# Altium PCB DeerDongle.PcbDoc
Units mil, origin at the board's own origin, x right, y up, seen from the top; angles counter-clockwise.
Board outline 2155.76 x 2254.08 mil, 4 copper layers (Top Layer, Mid Layer 1, Mid Layer 2, Bottom Layer), stack 46.063 mil thick; 30 components, 34 nets, 146 pads, 37 vias.
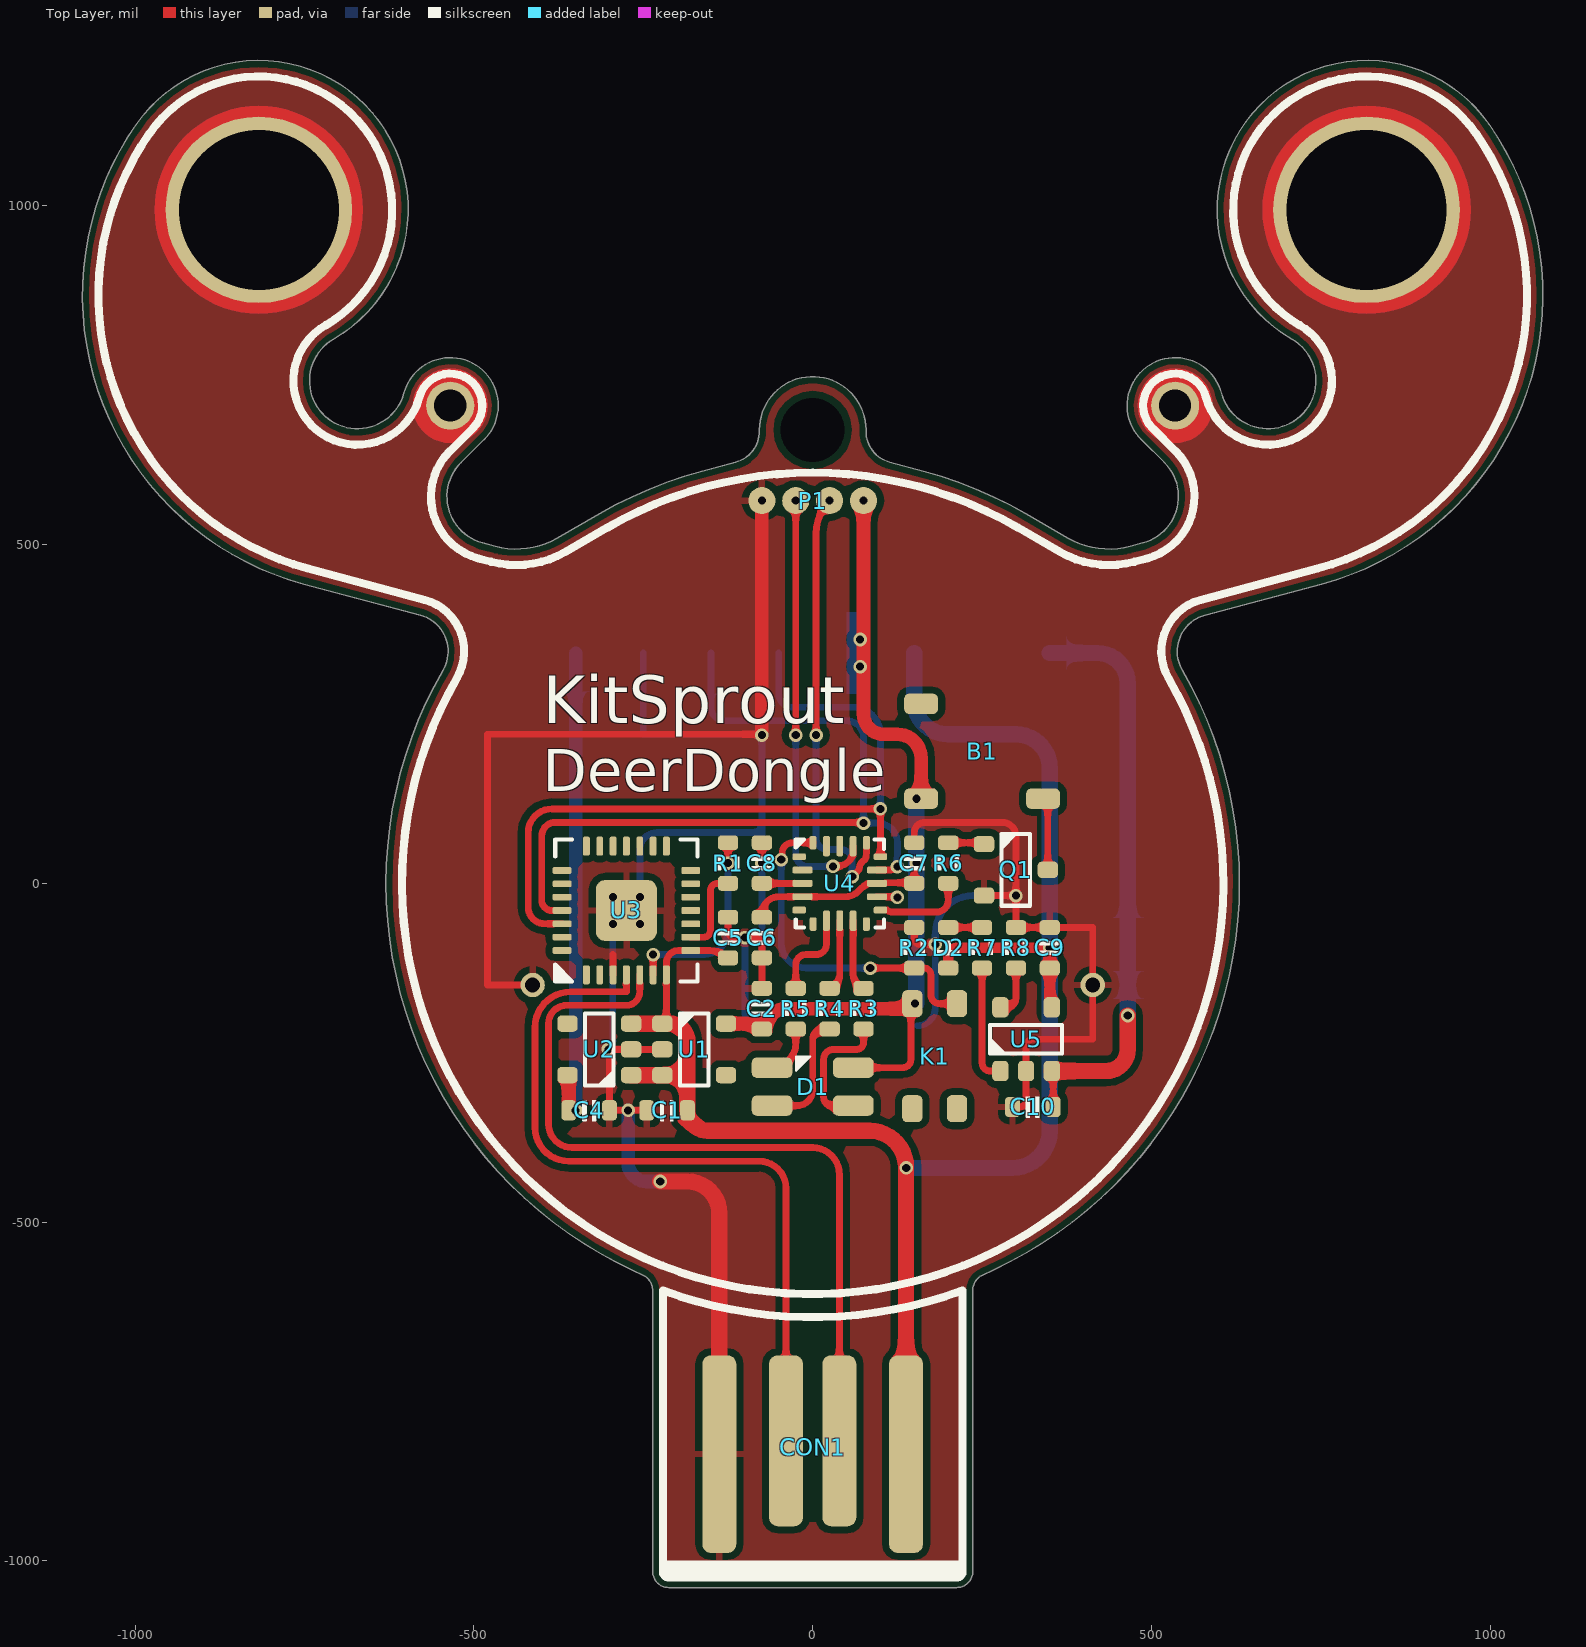
[diagram p0: Top Layer view]
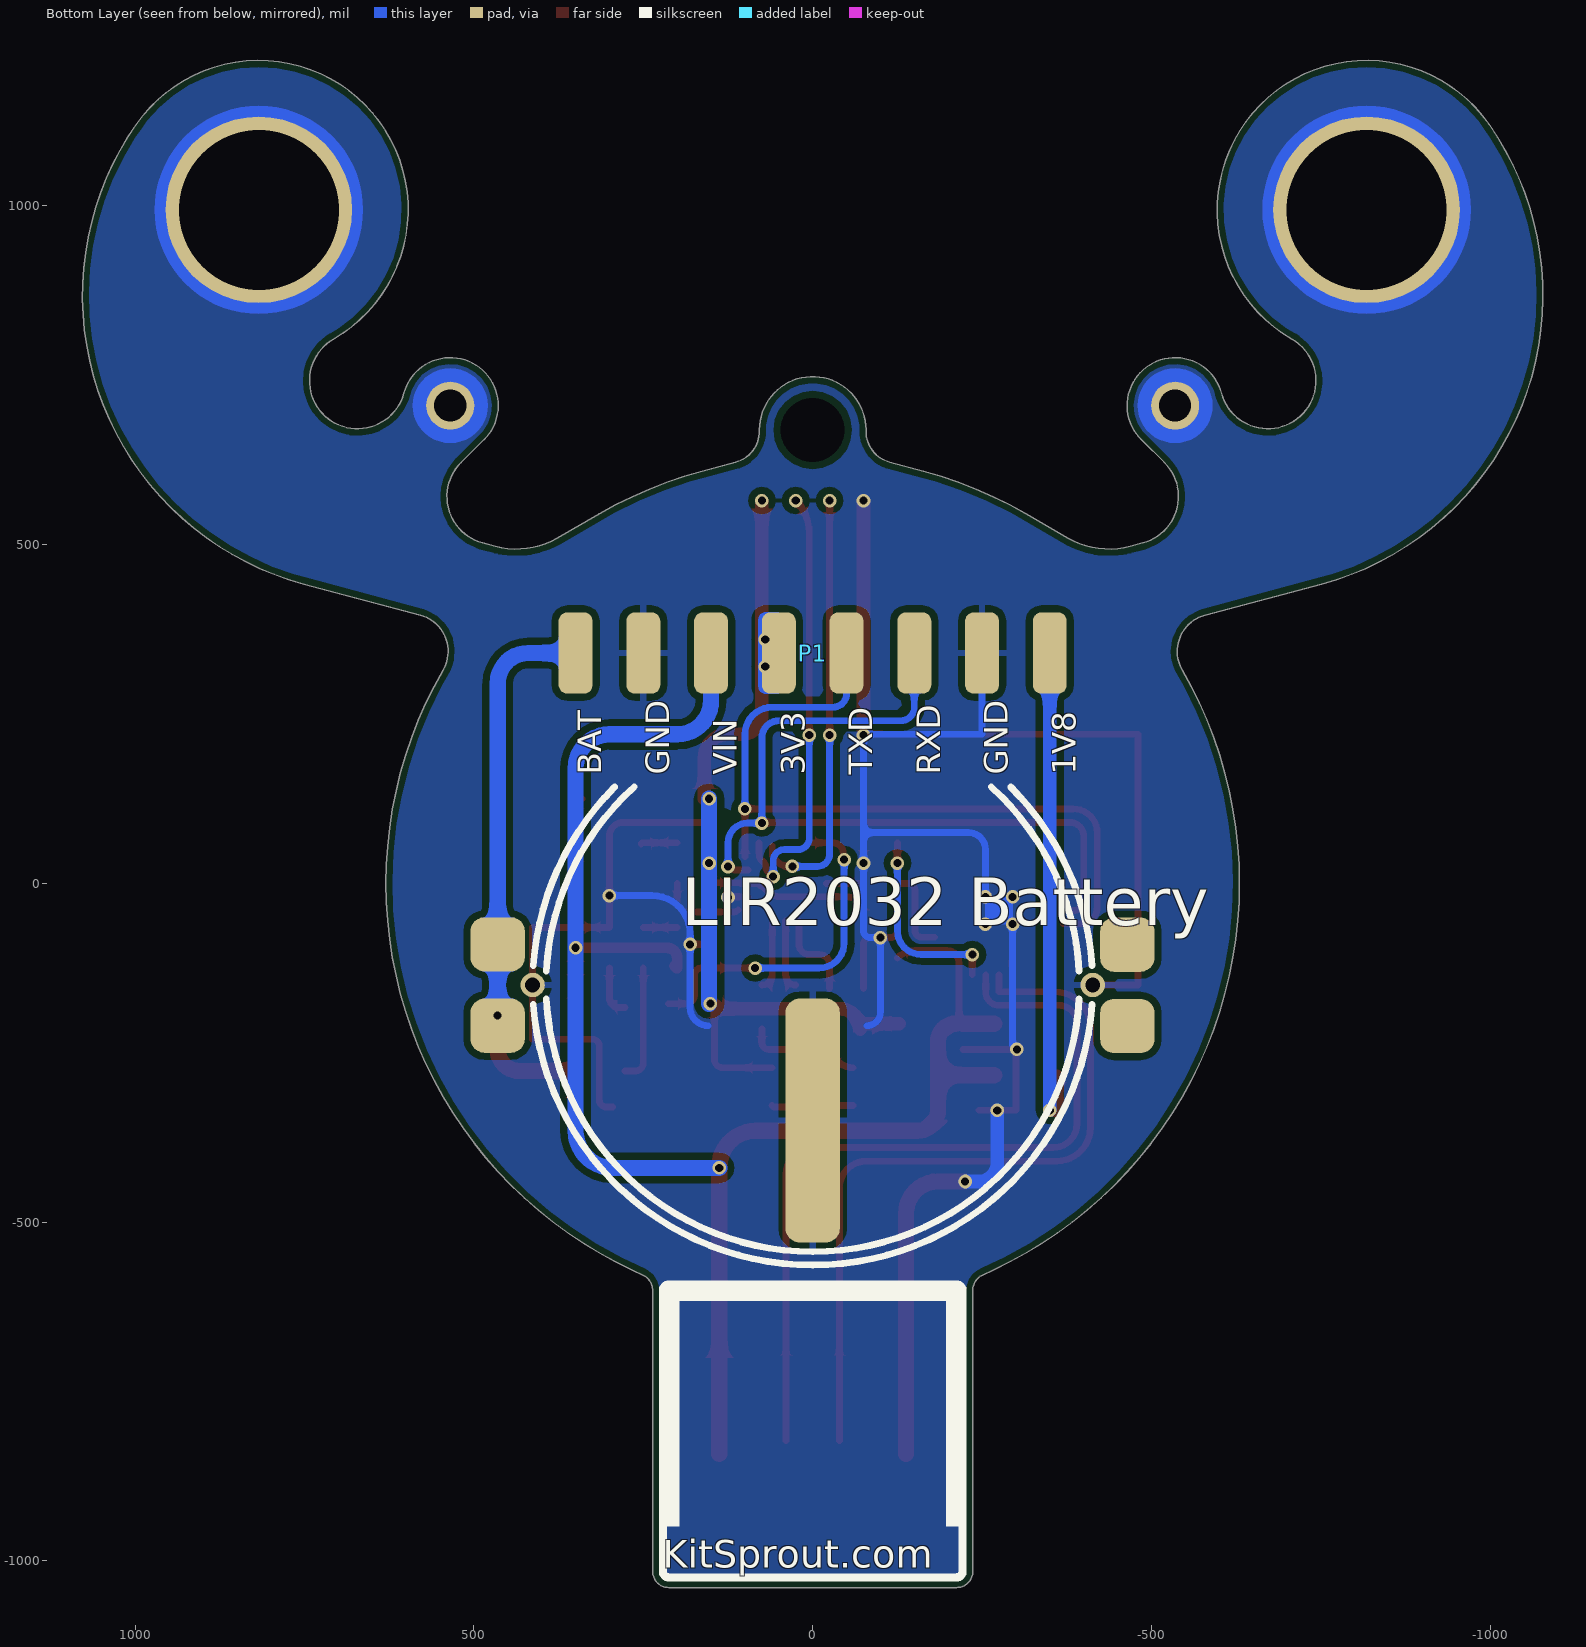
[diagram p1: Bottom Layer view, seen from below]
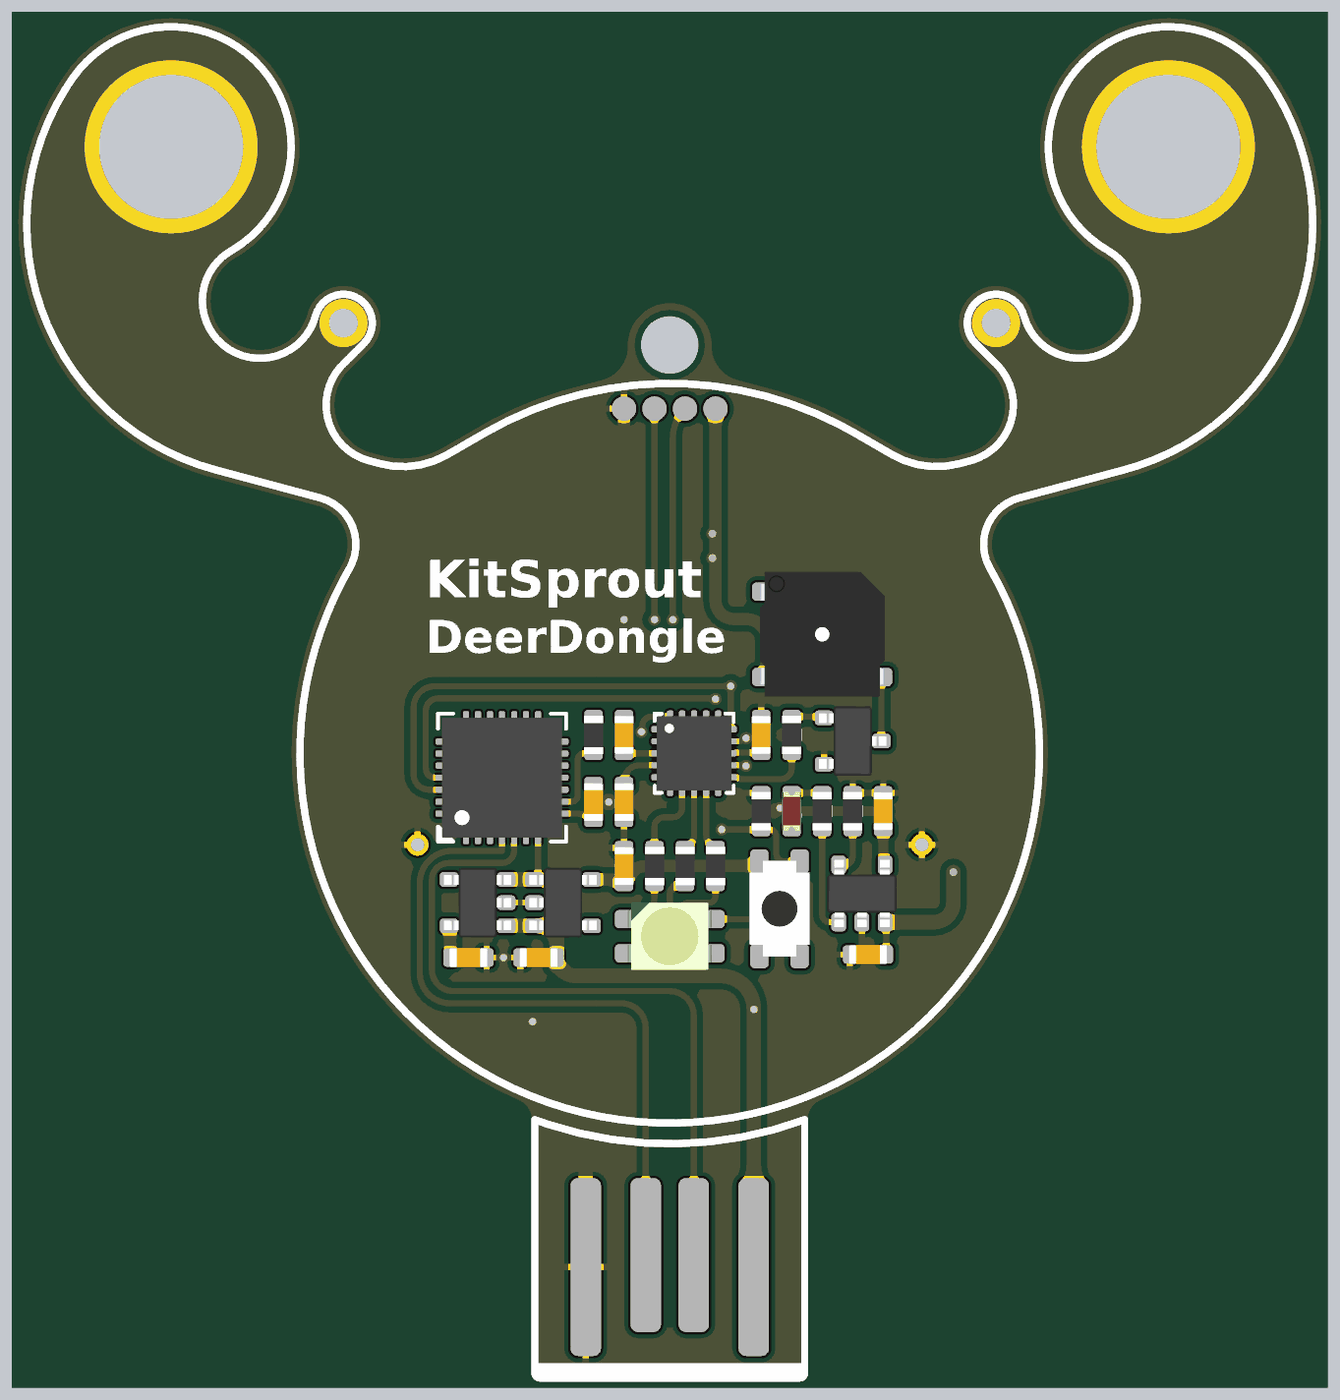
[diagram p2: 3D render of the assembled board from above, using the file's embedded part models]

## Layer stack, top to bottom
Top Solder: solder mask 0.3937, Solder Resist, Dk 3.5
Top Layer: signal copper 1.378
Dielectric 2: prepreg 7.874, PP-023, Dk 4.5
Mid Layer 1: signal copper 0.689
Dielectric 1: core 26.1811, Core-003, Dk 4.3
Mid Layer 2: signal copper 0.689
Dielectric 3: prepreg 7.874, PP-023, Dk 4.5
Bottom Layer: signal copper 1.378
Bottom Solder: solder mask 0.3937, Solder Resist, Dk 3.5

## Board outline
-266.22,-570.9 cw(c0,0) -545.53,314.96 ccw(c-593.26,342.52) -579,395.76 -751.09,441.87 cw(c-636.97,867.79) -998.17,1120.71 cw(c-817.57,994.25) -707.33,803.32 ccw(c-671.9,741.94) -603.45,723.6 cw(c-534.99,705.26) -484.88,655.15 -485.7,654.52 -519.11,621.12 ccw(c-469,571.01) -487.34,502.56 -468.73,497.57 ccw(c-437.49,614.17) -377.13,509.63 -314.96,545.53 cw(c0,0) -163.04,608.46 -113.76,621.66 ccw(c-125.98,667.3) -78.74,667.3 -78.74,669.29 cw(c0,669.29) 78.74,669.29 78.74,667.3 ccw(c125.98,667.3) 113.76,621.66 163.04,608.46 cw(c0,0) 314.96,545.53 377.13,509.63 ccw(c437.49,614.17) 468.73,497.57 487.34,502.56 ccw(c469,571.01) 519.11,621.12 485.7,654.52 484.88,655.15 cw(c534.99,705.26) 603.44,723.6 ccw(c671.9,741.94) 707.33,803.31 cw(c817.57,994.25) 998.17,1120.71 cw(c636.97,867.79) 751.09,441.87 579,395.76 ccw(c593.26,342.52) 545.53,314.96 cw(c0,0) 266.22,-570.9 250.73,-578.12 ccw(c261.34,-600.89) 236.23,-600.89 236.22,-600.9 236.22,-1015.75 cw(c212.6,-1015.75) 212.6,-1039.37 -212.6,-1039.37 cw(c-212.6,-1015.75) -236.22,-1015.75 -236.22,-600.9 -236.23,-600.89 ccw(c-261.34,-600.89) -250.73,-578.12

## Design rules (kind name [scope] priority, off if disabled: settings)
BoardOutlineClearance [All] p1: gap=10 ignorepadtopadclearanceinfootprint=FALSE
Clearance "Clearance Polygon 10mil" [InPolygon] p1: gap=10 ignorepadtopadclearanceinfootprint=TRUE except(0: Arc-Hole Track-Hole SMDPad-Hole THPad-Hole Via-Hole Fill-Hole Poly-Hole Region-Hole Text-Hole)
Clearance "Clearance Top Layer 6mil" [OnLayer('Top Layer')] p2: gap=6 ignorepadtopadclearanceinfootprint=TRUE except(8: Arc-THPad Arc-Hole Track-THPad Track-Hole SMDPad-THPad SMDPad-Hole THPad-THPad THPad-Hole Via-Hole Fill-Hole Poly-Hole Region-Hole Text-Hole; 10: Arc-Text Track-Text SMDPad-Text THPad-Text Via-Text Fill-Text Poly-Text Region-Text Text-Text)
Clearance "Clearance Top Layer 5mil" [OnLayer('Top Layer')] p3 off: gap=5 ignorepadtopadclearanceinfootprint=TRUE except(8: Arc-THPad Arc-Hole Track-THPad Track-Hole SMDPad-THPad SMDPad-Hole THPad-THPad THPad-Hole Via-Hole Fill-Hole Poly-Hole Region-Hole Text-Hole; 10: Arc-Text Track-Text SMDPad-Text THPad-Text Via-Text Fill-Text Poly-Text Region-Text Text-Text)
Clearance "Clearance Bottom Layer 6mil" [OnLayer('Bottom Layer')] p4: gap=6 ignorepadtopadclearanceinfootprint=TRUE except(8: Arc-THPad Arc-Hole Track-THPad Track-Hole SMDPad-THPad SMDPad-Hole THPad-THPad THPad-Hole Via-Hole Fill-Hole Poly-Hole Region-Hole Text-Hole; 10: Arc-Text Track-Text SMDPad-Text THPad-Text Via-Text Fill-Text Poly-Text Region-Text Text-Text)
Clearance "Clearance Bottom Layer 5mil" [OnLayer('Bottom Layer')] p5 off: gap=5 ignorepadtopadclearanceinfootprint=TRUE except(8: Arc-THPad Arc-Hole Track-THPad Track-Hole SMDPad-THPad SMDPad-Hole THPad-THPad THPad-Hole Via-Hole Fill-Hole Poly-Hole Region-Hole Text-Hole; 10: Arc-Text Track-Text SMDPad-Text THPad-Text Via-Text Fill-Text Poly-Text Region-Text Text-Text)
Clearance "Clearance 6mil" [All] p6: gap=6 ignorepadtopadclearanceinfootprint=TRUE except(8: Arc-THPad Arc-Hole Track-THPad Track-Hole SMDPad-THPad SMDPad-Hole THPad-THPad THPad-Hole Via-Hole Fill-Hole Poly-Hole Region-Hole Text-Hole; 10: Arc-Text Track-Text SMDPad-Text THPad-Text Via-Text Fill-Text Poly-Text Region-Text Text-Text)
Clearance "Clearance 5mil" [All] p7 off: gap=5 ignorepadtopadclearanceinfootprint=TRUE except(8: Arc-THPad Arc-Hole Track-THPad Track-Hole SMDPad-THPad SMDPad-Hole THPad-THPad THPad-Hole Via-Hole Fill-Hole Poly-Hole Region-Hole Text-Hole; 10: Arc-Text Track-Text SMDPad-Text THPad-Text Via-Text Fill-Text Poly-Text Region-Text Text-Text)
Clearance "Clearance 4mil" [All] p8 off: gap=5 ignorepadtopadclearanceinfootprint=TRUE except(4: Arc-Arc Arc-Track Arc-SMDPad Track-Track Track-SMDPad SMDPad-SMDPad; 8: Arc-THPad Arc-Hole Track-THPad Track-Hole SMDPad-THPad SMDPad-Hole THPad-THPad THPad-Hole Via-Hole Fill-Hole Poly-Hole Region-Hole Text-Hole; 10: Arc-Text Track-Text SMDPad-Text THPad-Text Via-Text Fill-Text Poly-Text Region-Text Text-Text)
ComponentClearance [All] p1: gap=0 collisioncheckmode=3 verticalgap=0 showdistances=FALSE
Height [All] p1: minheight=0 maxheight=5000 prefheight=500
HoleSize [All] p1: absolutevalues=TRUE maxlimit=248.03 minlimit=8 maxpercent=80.000 minpercent=20.000
MinimumAnnularRing [All] p1: minimumring=3
MinimumSolderMaskSliver [All] p1: minsoldermaskwidth=0
PlaneConnect [All] p1: pad.planeconnectstyle=Relief pad.reliefexpansion=20 pad.reliefentries=4 pad.reliefconductorwidth=10 pad.reliefairgap=10 via.planeconnectstyle=Direct via.reliefexpansion=20 via.reliefentries=4 via.reliefconductorwidth=10 via.reliefairgap=10
PolygonConnect [All] p1: thpad.connectstyle=Relief thpad.reliefconductorwidth=10 thpad.reliefentries=4 thpad.polygonreliefangle="90 Angle" thpad.airgapwidth=10 smdpad.connectstyle=Relief smdpad.reliefconductorwidth=10 smdpad.reliefentries=4 smdpad.polygonreliefangle="90 Angle" smdpad.airgapwidth=10 via.connectstyle=Direct via.reliefconductorwidth=10 via.reliefentries=4 via.polygonreliefangle="90 Angle" via.airgapwidth=10
RoutingCorners [All] p1: cornerstyle=Round minsetback=100 maxsetback=100
RoutingVias [All] p1: holewidth=20 width=40 viastyle="Through Hole" minholewidth=8 minwidth=18 maxholewidth=40 maxwidth=80
SMDEntry [All] p1: side=TRUE corner=TRUE anyangle=TRUE
SMDToCorner [All] p1: distance=0
SMDToPlane [All] p1: distance=0
SilkToSilkClearance [All] p1: silktosilkclearance=4
SilkToSolderMaskClearance [IsPad] p1: minsilkscreentomaskgap=0 clearancetoexposedcopper=TRUE
SolderMaskExpansion [All] p1: expansion=4 istentingtop=FALSE
UnRoutedNet [All] p1: checkbadconnections=TRUE
ViasUnderSMD [All] p1: allowed=TRUE
Width "Width 6mil" [All] p1: maxlimit=100 minlimit=3.5 preferedwidth=15 toplayer_minwidth=6 bottomlayer_minwidth=6 minimp=50.000000 maximp=50.000000 favimp=50.000000
Width "Width 5mil" [All] p2 off: maxlimit=100 minlimit=3.5 preferedwidth=15 toplayer_minwidth=5 bottomlayer_minwidth=5 minimp=50.000000 maximp=50.000000 favimp=50.000000
21 further rules are at their usual default settings.

## Components (designator, comment, footprint, x,y, rotation, side; value= is the part's Value field where it differs from the comment)
B1 "Buzzer" Buzzer_5.0x5.0x2.0 250,190 r90 top
C1 "C0603" CAP_0603 -215,-335 r0 top value=10uF
C2 "C0603" CAP_0603 -75,-185 r270 top value=4.7uF
C4 "C0603" CAP_0603 -330,-335 r180 top value=4.7uF
C5 "C0603" CAP_0603 -125,-80 r270 top value=0.1uF
C6 "C0603" CAP_0603 -75,-80 r90 top value=0.1uF
C7 "C0603" CAP_0603 150,30 r270 top value=0.1uF
C8 "C0603" CAP_0603 -75,30 r270 top value=0.1uF
C9 "C0603" CAP_0603 350,-95 r270 top value=4.7uF
C10 "C0603" CAP_0603 325,-330 r0 top value=4.7uF
CON1 "USB_Plug_TypeA" USB_TypeA_Plug_PCB 0,-807.09 r180 top value="Type A"
D1 "D3528" LED_3528_RGB 0,-300 r0 top value=RGB
D2 "D0603" LED_0603_RED 200,-95 r270 top value=RED
K1 "TACT" Button_TACT_180_4P_3.0x3.5 180,-255 r270 top value=4P
P1 "HDR1x8" HDR1X8_2.54_180H 0,340 r90 bottom locked value=2.54
P1 "HDR1x4" HDR1X4_1.27_180 0,565 r270 top value=1.27
Q1 "2N2222" SOT23-3 300,20 r0 top
R1 "R0603" RES_0603 -125,30 r270 top value=1K
R2 "R0603" RES_0603 150,-95 r270 top value=1K
R3 "R0603" RES_0603 75,-185 r270 top value=1K
R4 "R0603" RES_0603 25,-185 r270 top value=1K
R5 "R0603" RES_0603 -25,-185 r270 top value=1K
R6 "R0603" RES_0603 200,30 r90 top value=1K
R7 "R0603" RES_0603 250,-95 r90 top value=1K
R8 "R0603" RES_0603 300,-95 r270 top value=30K
U1 "XC6220B331" SOT23-5 -175,-245 r0 top value=3.3V
U2 "XC6220B331" SOT23-5 -315,-245 r180 top value=3.3V
U3 "CP2102N-28" QFN28_P0.5_5.0x5.0_H -275,-40 r90 top locked
U4 "STM32L011F" QFN20_P0.5_3.0x3.0 40,0 r0 top value=32MHz
U5 "MCP73831T-2xxI/OT" SOT23-5 315,-230 r90 top

## Footprints (in the part's own frame and the unit in brackets; to place one, negate y for a bottom-side part, rotate by r counter-clockwise, add the part's x,y. Pads: shape width x height; smd on the part's side, far side on the other; paste and mask are expansions set on the pad)
Button_TACT_180_4P_3.0x3.5 [mil]
  rrect50% 40x30 smd: 1(-77.5,33) 2(77.5,33) 3(-77.5,-33) 4(77.5,-33)
  body extent -79,-49 79,49, height 63
Buzzer_5.0x5.0x2.0 [mil]
  rrect50% 30x50 smd: N(-65.01,-90) NC(74.99,90) P(-65.01,90)
  body extent -97,-102 107,102, height 80
CAP_0603 [mil]
  rrect50% 22x30 smd: 1(-30,0) 2(30,0)
  silkscreen extent -9,-15 10,15, body extent -31,-16 31,16, height 31
HDR1X4_1.27_180 [mil]
  round 40 smd: 1(0,75) 2(0,25) 3(0,-25) 4(0,-75)
HDR1X8_2.54_180H [mil]
  rrect50% 120x50 smd: 1(0,350) 2(0,250) 3(0,150) 4(0,50) 5(0,-50) 6(0,-150) 7(0,-250) 8(0,-350)
LED_0603_RED [mil]
  rrect50% 22x30 smd: 1(30,0) 2(-30,0)
  silkscreen extent -10,-16 10,16, body extent -32,-16 32,16, height 24
LED_3528_RGB [mil]
  rrect50% 60x30 smd: 1(-60,28) 2(-60,-28) 3(60,-28) 4(60,28)
  silkscreen extent -25,23 -3,45, body extent -69,-55 69,55, height 75
QFN20_P0.5_3.0x3.0 [mil]
  rrect50% 20x10 smd: 1(-60,39.37) 5(-60,-39.37) 11(60,-39.37) 15(60,39.37)
  rrect50% 30x10 smd: 2(-55,19.69) 3(-55,0) 4(-55,-19.68) 12(55,-19.68) 13(55,0) 14(55,19.69)
  rrect50% 10x20 smd: 6(-39.37,-60) 10(39.37,-60) 16(39.37,60) 20(-39.37,60)
  rrect50% 10x30 smd: 7(-19.69,-55) 8(0,-55) 9(19.68,-55) 17(19.68,55) 18(0,55) 19(-19.69,55)
  silkscreen extent -65,-65 65,65, body extent -61,-61 61,61, height 24
QFN28_P0.5_5.0x5.0_H [mil]
  rrect50% 28x10 smd: 1(-95,59.06) 2(-95,39.37) 3(-95,19.69) 4(-95,0) 5(-95,-19.68) 6(-95,-39.37) 7(-95,-59.06) 15(95,-59.06) 16(95,-39.37) 17(95,-19.68) 18(95,0) 19(95,19.69) 20(95,39.37) 21(95,59.06)
  rrect50% 10x28 smd: 8(-59.06,-95) 9(-39.37,-95) 10(-19.69,-95) 11(0,-95) 12(19.68,-95) 13(39.37,-95) 14(59.06,-95) 22(59.06,95) 23(39.37,95) 24(19.68,95) 25(0,95) 26(-19.69,95) 27(-39.37,95) 28(-59.06,95)
  rrect30% 90x90 smd paste-100: 29(0,0)
  rrect30% 35x35 on Top Paste: ""(-22,-22) ""(-22,22) ""(22,-22) ""(22,22)
  silkscreen extent -105,-105 105,105, body extent -98,-98 98,98, height 39
RES_0603 [mil]
  rrect50% 22x30 smd: 1(-30,0) 2(30,0)
  silkscreen extent -10,-16 10,16, body extent -31,-16 31,16, height 18
SOT23-3 [mil]
  rrect50% 30x24 smd: 1(-47,38) 2(-47,-38) 3(47,0)
  silkscreen extent -21,-53 21,53, body extent -55,-57 55,57, height 45
SOT23-5 [mil]
  rrect50% 30x24 smd: 1(-47,38) 2(-47,0) 3(-47,-38) 4(47,-38) 5(47,38)
  silkscreen extent -21,-53 21,53, body extent -55,-57 55,57, height 45
USB_TypeA_Plug_PCB [mm]
  rrect50% 1.27x7.41 smd: 1(-3.5,0.897) 4(3.5,0.897)
  rrect50% 1.27x6.41 smd: 2(-1,0.397) 3(1,0.397)

## Part data
B1: library part Buzzer_5x5, Specification=5.0x5.0mm, Type=SMD3
C1 C2 C4 C5 C6 C7 C8 C9 C10: library part Cap_0603, "Capacitor", Note=±10%, Specification="X7R, 16V", Type=0603
CON1: library part USB_TypeA_Plug, "USB", Type=Male
D1: library part LED_3528_RGB, "LED", Type=3528
D2: library part LED_0603, "LED", Manufacturer="Everlight Electronics", Type=0603
K1: library part Button_TACT_180_4P_3.0x3.5, "Button", Specification=3.0x3.5mm, Type=TACT
P1: library part HDR1x8_2.54, "Header", Note=1x8, Type=DIP
P1: library part HDR1x4_1.27, "Header", Note=1x4, Type=DIP
Q1: library part BJT_NPN, "Transistor", Note=NPN, Type=SOT23-3
R1 R2 R3 R4 R5 R6 R7 R8: library part Res_0603, "Resistor", Note=±1%, Specification=1/10W, Type=0603
U1 U2: library part XC6220x_SOT25, "LDO", Manufacturer="Torex Semiconductor", Datasheet=https://www.torexsemi.com/file/xc6220/XC6220.pdf, Link=https://www.torexsemi.com/products/single-type-voltage-regulators/series/?name=xc6220, Note=6.5V, Specification=1000mA, Type=SOT23-5
U3: "USB2UART", Manufacturer="Silicon Laboratories", Datasheet=https://www.silabs.com/documents/public/data-sheets/cp2102n-datasheet.pdf, Link=https://www.silabs.com/interface/usb-bridges/usbxpress/device.cp2102n-gqfn28, Type="QFN28 P0.5"
U4: "MCU ST", Manufacturer=STMicroelectronics, Datasheet=https://www.st.com/resource/en/datasheet/stm32l011f3.pdf, Link=https://www.st.com/en/microcontrollers-microprocessors/stm32l011f3.html, Note=CortexM0, Specification="16K Flash, 2K SRAM", Type=QFN20
U5: library part MCP73831_SOT25, "Charge", Manufacturer=Microchip, Datasheet=http://ww1.microchip.com/downloads/en/DeviceDoc/MCP73831-Family-Data-Sheet-DS20001984H.pdf, Link=https://www.microchip.com/wwwproducts/en/en024903, Specification="Li-Ion / Li-Po", Type=SOT23-5

## Free pads (board coordinates)
  round 275.59 hole 236.22: ""(-817.57,994.25) ""(817.57,994.25)
  round 70.87 hole 47.24: ""(-534.99,705.26) ""(534.99,705.26)
  rrect50% 80x80 smd far side: ""(-464.41,-210.43) ""(-464.41,-90.43) ""(465,-210) ""(465,-90)
  round 36 hole 22: ""(-413.39,-150) ""(413.39,-150)
  rrect50% 80x360 smd far side: ""(0,-350)
  round 0 hole 94.49 unplated: ""(0,669.29)

## Via types
v1: diameter 20, hole 12, Top Layer to Bottom Layer, tented both sides, 37 vias

## Nets (pads, with @x,y where several pads share a name; then routed paths per layer and width w, separated by ;. In a path a pad name is that pad's centre, name@x,y a point inside that pad or via, vN(x,y) a via of type N, cw(c..) or ccw(c..) an arc to the next point about the centre after c; other vN are vias at no path point)
+1V8: C4.2 P1.8 U2.5 | length 738.1
  Top Layer w10: U2.5 cw(c-362,-285) U2.5@-360,-285
  Top Layer w20: U2.5@-360,-285 C4.2 v1(-350,-335)
  Bottom Layer w20: v1(-350,-335) P1.8
+3V3: B1.P C2.2 C6.2 C7.2 D1.4 K1.3 P1.1@75,565 P1.4@50,340 U1.5 U4.4 U4.13 | length 1555.4
  Top Layer w10: C6.2 -75,-45 cw(c-49.68,-45) -49.68,-19.68 U4.4 48.45,-19.68 ccw(c48.45,6.55) 67,-12 73,-6 cw(c87.49,-20.49) 87.49,0 U4.13 106.46,0 107.46,1 149,1 C7.2 150,20 cw(c160,20) v1@160,30 ; D1.4 133,-272 ccw(c133,-260) 145,-260 K1.3@145,-179.5
  Top Layer w20: U1.5 C2.2@-68.91,-207 ; C2.2@-70,-215 -69.14,-208.7 C2.2@-68.91,-207 ; v1(75,565) 75,250 ccw(c105,250) 105,220 125,220 cw(c125,185) 160,185 B1.P ; K1.3 145,-179.5 139.5,-185 -40,-185 ccw(c-40,-215) C2.2@-68.91,-207
  Bottom Layer w24: v1@153,-177.5 v1(153,30) v1(153,124.99)
  other v1: 151,-177.5 70,320 70,360
+VBAT: C10.2 P1.1@350,340 pad.@465,-90 pad.@465,-210 U5.3 | length 880.1
  Top Layer w10: U5.3 cw(c353,-279) 355,-279 C10.2
  Top Layer w24: U5.3 433,-277 ccw(c433,-245) 465,-245 v1(465,-195)
  Bottom Layer w24: P1.1@350,340 420,340 cw(c420,295) 465,295 465,-90 v1(465,-195) pad.@465,-210
+VIN: C1.2 C5.2 C9.2 CON1.1 D2.1 P1.3@150,340 U1.1 U1.3 U2.1 U2.3 U3.7 U3.8 U5.4 | length 2629.4
  Top Layer w10: U1.1@-215.94,-207 U3.7 -215.94,-117.03 cw(c-197.97,-117.03) -197.97,-99.06 U3.8 -151.42,-99.06 cw(c-151.42,-136.42) C5.2
  Top Layer w16: D2.1@204.09,-122 201.09,-125 D2.1 200,-110 cw(c215,-110) 215,-95 v1(350,-95) C9.2 U5.4@350,-180
  Top Layer w24: U2.1 -185,-283 ; U2.3 U1.1 ; U1.1@-210.94,-207 cw(c-210.94,-232.95) -185,-232.95 -185,-283 ; CON1.1 137.8,-419.12 ccw(c83.68,-419.12) 83.68,-365 -155,-365 cw(c-155,-335) C1.2 -185,-283
  Bottom Layer w24: v1(138,-420) 295,-420 ccw(c295,-365) 350,-365 v1(350,-95) 350,170 ccw(c300,170) 300,220 200,220 cw(c200,270) 150,270 P1.3@150,340
BUZ: R6.1 U4.11 | length 125.7
  Top Layer w10: U4.11@110,-39.37 ccw(c117.24,-32.13) 117.24,-42.37 182.63,-42.37 ccw(c182.63,-25) 200,-25 R6.1
D+: CON1.3 U3.4 | length 1132
  Top Layer w10: U3.4 -275,-160 -357,-160 ccw(c-357,-213) -410,-213 -410,-360 ccw(c-360,-360) -360,-410 -79.37,-410 cw(c-79.37,-450) -39.37,-450 CON1.3
D-: CON1.2 U3.5 | length 1199.8
  Top Layer w10: U3.5 -255.32,-160.32 cw(c-275,-160.32) -275,-180 -363,-180 ccw(c-363,-207) -390,-207 -390,-355 ccw(c-355,-355) -355,-390 0,-390 cw(c0,-429.37) 39.37,-429.37 CON1.2
GND: C1.1 C2.1 C4.1 C5.1 C6.1 C7.1 C8.1 C9.1 C10.1 CON1.4 P1.2@250,340 P1.4@-75,565 P1.7 pad.@0,-350 pad.@413.39,-150 pad.@534.99,705.26 pad.@817.57,994.25 pad.@-413.39,-150 pad.@-534.99,705.26 pad.@-817.57,994.25 Q1.2 R2.1 R8.1 U1.2 U2.2 U3.3 U3.29 U4.12 U5.2 | length 4677.8
  Top Layer w10: pad.@-413.39,-150 -480,-150 -480,220 v1@-75,220 ; v1(-301.5,-245) v1@-300,-245 ; -295,-105 -294.69,-105.31 U3.3 ; C1.1 v1(-272.5,-335) C4.1 v1@-300,-245 ; U1.2 U2.2 v1@-300,-245 ; C5.1 -125,-70 ccw(c-115,-70) -115,-80 v1(-100,-80) -85,-80 cw(c-85,-90) -75,-90 C6.1 C2.1 ; v1(-75,30) C8.1 ; U4.12 v1@125,-19.68 ; R2.1 150,-82 ccw(c158,-82) 158,-90 v1(181,-90) ; C7.1 150,75 cw(c165,75) 165,90 280,90 cw(c280,70) 300,70 v1(300,-18) ; Q1.2 v1(300,-18) ; C10.1 305,-330 ccw(c305,-320) 315,-320 U5.2 315,-240 cw(c325,-240) 325,-230 413.39,-230 413.39,-150 413.39,-65 C9.1 R8.1 v1(300,-18)
  Top Layer w20: v1(-75,219) -75,220 v1(-75,565)
  Top Layer w24: v1(-225,-440) -185,-440 cw(c-185,-487.2) -137.8,-487.2 CON1.4
  Bottom Layer w10: v1(-301.5,-245) -295,-238.5 v1(-295,-60) ; v1(-255,-20) -255,50 cw(c-230,50) -230,75 -75,75 ; P1.7 -250,220 -75,220 -75,75 ; -80,-210 cw(c-80,-190) -100,-190 v1(-100,-80) -85,-80 ccw(c-85,-70) -75,-70 v1(-75,30) -75,75 ; 154.25,-210 ccw(c154.25,-183.25) 181,-183.25 v1(181,-90) 181,-74 cw(c237,-74) 237,-18 v1(300,-18)
  Bottom Layer w20: v1(-272.5,-335) -272.5,-412.5 ccw(c-245,-412.5) -245,-440 v1(-225,-440)
  other v1: -255,-60 125,-20.68 -295,-20
KEY: K1.1 R2.2 U4.20 | length 512.8
  Top Layer w10: v1@-49.37,35 ccw(c-49.37,39.37) -45,39.37 -45,45 cw(c-30,45) -30,60 U4.20 ; v1(85,-125) R2.2 165,-125 cw(c164.38,-134.98) 174.24,-133.29 ccw(c190.5,-130.5) 174.65,-135.1 174.65,-165 ccw(c187.15,-165) 187.15,-177.5 K1.1
  Bottom Layer w10: v1(-46.37,35) -46.37,-88 ccw(c-9.37,-88) -9.37,-125 v1(85,-125)
LED_B: R3.1 U4.9 | length 103.7
  Top Layer w10: U4.9 59.68,-134.68 ccw(c75,-134.68) R3.1@75,-150
LED_G: R4.1 U4.8 | length 103.6
  Top Layer w10: R4.1@25,-150 ccw(c25,-135) 40,-135 U4.8
LED_R: R5.1 U4.7 | length 132.3
  Top Layer w10: R5.1 -25,-120 cw(c-10,-120) -10,-105 5,-105 ccw(c5,-89.69) 20.31,-89.69 U4.7
NetB1_N: B1.N Q1.3 | length 109
  Top Layer w10: B1.N cw(c340,117.99) 347,117.99 Q1.3
NetD1_1: D1.1 R5.2 | length 101.6
  Top Layer w10: D1.1@-37.81,-262.81 cw(c-60,-240.62) D1.1 ccw(c-60,-237) -25,-237 R5.2
NetD1_2: D1.2 R4.2 | length 181.7
  Top Layer w10: D1.2 -23,-328 ccw(c-23,-305) 0,-305 0,-230 cw(c15,-230) 15,-215 R4.2
NetD1_3: D1.3 R3.2 | length 203.7
  Top Layer w10: D1.3@30,-330 58,-330 D1.3 ; 30,-245 65,-245 ccw(c65,-235) 75,-235 R3.2 ; D1.3@31,-330 cw(c31,-315) 16,-315 16,-260 cw(c31,-260) 31,-245
NetD2_2: D2.2 R7.2 | length 50
  Top Layer w10: D2.2 R7.2
NetQ1_1: Q1.1 R6.2 | length 54.1
  Top Layer w10: R6.2 251,60 cw(c251,58) Q1.1
NetR1_1: R1.1 U3.6 | length 290.5
  Top Layer w10: U3.6 v1(-235.63,-105) ; v1(-125,30) R1.1
  Bottom Layer w10: v1(-235.63,-105) -160.21,-105 ccw(c-160.21,-69.79) -125,-69.79 v1(-125,30)
NetR1_2: R1.2 U3.9 | length 125.8
  Top Layer w10: U3.9 -160.37,-79.37 ccw(c-160.37,-70) -151,-70 -151,-10.53 cw(c-140.47,-10.53) -140.47,0 R1.2
NetR8_2: R8.2 U5.5 | length 75.4
  Top Layer w10: U5.5 287,-183 ccw(c287,-170) 300,-170 R8.2
OSC_IN: U4.1
OSC_OUT: U4.2
PA0: U4.5
PA1: U4.6
PA7: U4.10
PB6: U4.18
PB7: U4.19
RST: C8.2 U4.3 | length 50
  Top Layer w10: C8.2@-70,0 U4.3@-20,0
STAT: R7.1 U5.1 | length 173.8
  Top Layer w10: R7.1 250,-265 ccw(c262,-265) 262,-277 U5.1
SWCLK: P1.3@-25,565 U4.17 | length 636.7
  Top Layer w10: v1(-25,219) v1(-25,565) ; v1(30,25) 35.01,25 ccw(c35.01,50.9) 53.32,32.58 ccw(c37.96,47.95) 59.68,47.95 U4.17
  Bottom Layer w10: v1(-25,219) -25,43 ccw(c-7,43) -7,25 v1(30,25)
SWDIO: P1.2@25,565 U4.16 | length 656.7
  Top Layer w10: v1(5,219) 5,516.72 cw(c73.28,516.72) v1(25,565) ; v1(58.37,10) 66.23,17.86 ccw(c59.16,24.93) 69.09,23.76 cw(c82.5,22.19) 74.74,33.24 ccw(c69,41.42) 79,41.42 79,41.87 cw(c92.5,41.87) 79.21,44.26 ccw(c69.37,46.02) 79.37,46.07 U4.16
  Bottom Layer w10: v1(5,219) 5,66.69 ccw(c21.69,66.69) 21.69,50 41.69,50 cw(c41.69,33.32) 58.37,33.32 v1(58.37,10)
UART_RX: P1.5 U3.26 U4.15 | length 1138.9
  Top Layer w10: U3.26 -395.31,-59.69 cw(c-395.31,-35) -420,-35 -420,75 cw(c-385,75) -385,110 v1(100,110) U4.15
  Bottom Layer w10: P1.5 -50,280 ccw(c-30,280) -30,260 60,260 cw(c60,220) 100,220 v1(100,110)
UART_TX: P1.6 U3.25 U4.14 | length 1204.9
  Top Layer w10: U3.25 -385,-40 cw(c-385,-25) -400,-25 -400,70 cw(c-380,70) -380,90 v1@70,90 ; U4.14 112.93,19.69 ccw(c112.93,36.76) v1(125,24.69)
  Bottom Layer w10: P1.6 -150,260 ccw(c-130,260) -130,240 50,240 cw(c50,215) 75,215 v1(75,89) 96,89 cw(c96,60) 125,60 v1(125,24.69)
pads on no net: B1.NC K1.2 K1.4 U1.4 U2.4 U3. U3.1 U3.2 U3.10 U3.11 U3.12 U3.13 U3.14 U3.15 U3.16 U3.17 U3.18 U3.19 U3.20 U3.21 U3.22 U3.23 U3.24 U3.27 U3.28

## Polygon pours and split planes (outlines as drawn)
GND on Bottom Layer "Bottom Layer-No Net" (solid, remove dead copper, pour order 1): -266.22,-570.9 cw(c0,0) -545.53,314.96 ccw(c-593.26,342.52) -579,395.76 -751.09,441.87 cw(c-636.97,867.79) -998.17,1120.71 cw(c-817.57,994.25) -707.33,803.32 ccw(c-671.9,741.94) -603.45,723.6 cw(c-534.99,705.26) -484.88,655.15 -485.7,654.52 -519.11,621.12 ccw(c-469,571.01) -487.34,502.56 -468.73,497.57 ccw(c-437.49,614.17) -377.13,509.63 -314.96,545.53 cw(c0,0) -163.04,608.46 -113.76,621.66 ccw(c-125.98,667.3) -78.74,667.3 -78.74,669.29 cw(c0,669.29) 78.74,669.29 78.74,667.3 ccw(c125.98,667.3) 113.76,621.66 163.04,608.46 cw(c0,0) 314.96,545.53 377.13,509.63 ccw(c437.49,614.17) 468.73,497.57 487.34,502.56 ccw(c469,571.01) 519.11,621.12 485.7,654.52 484.88,655.15 cw(c534.99,705.26) 603.44,723.6 ccw(c671.9,741.94) 707.33,803.31 cw(c817.57,994.25) 998.17,1120.71 cw(c636.97,867.79) 751.09,441.87 579,395.76 ccw(c593.26,342.52) 545.53,314.96 cw(c0,0) 266.22,-570.9 250.73,-578.12 ccw(c261.34,-600.89) 236.23,-600.89 236.22,-600.9 236.22,-1015.75 cw(c212.6,-1015.75) 212.6,-1039.37 -212.6,-1039.37 cw(c-212.6,-1015.75) -236.22,-1015.75 -236.22,-600.9 -236.23,-600.89 ccw(c-261.34,-600.89) -250.73,-578.12
GND on Top Layer "Top Layer-No Net" (solid, remove dead copper, pour order 0): -266.22,-570.9 cw(c0,0) -545.53,314.96 ccw(c-593.26,342.52) -579,395.76 -751.09,441.87 cw(c-636.97,867.79) -998.17,1120.71 cw(c-817.57,994.25) -707.33,803.32 ccw(c-671.9,741.94) -603.45,723.6 cw(c-534.99,705.26) -484.88,655.15 -485.7,654.52 -519.11,621.12 ccw(c-469,571.01) -487.34,502.56 -468.73,497.57 ccw(c-437.49,614.17) -377.13,509.63 -314.96,545.53 cw(c0,0) -163.04,608.46 -113.76,621.66 ccw(c-125.98,667.3) -78.74,667.3 -78.74,669.29 cw(c0,669.29) 78.74,669.29 78.74,667.3 ccw(c125.98,667.3) 113.76,621.66 163.04,608.46 cw(c0,0) 314.96,545.53 377.13,509.63 ccw(c437.49,614.17) 468.73,497.57 487.34,502.56 ccw(c469,571.01) 519.11,621.12 485.7,654.52 484.88,655.15 cw(c534.99,705.26) 603.44,723.6 ccw(c671.9,741.94) 707.33,803.31 cw(c817.57,994.25) 998.17,1120.71 cw(c636.97,867.79) 751.09,441.87 579,395.76 ccw(c593.26,342.52) 545.53,314.96 cw(c0,0) 266.22,-570.9 250.73,-578.12 ccw(c261.34,-600.89) 236.23,-600.89 236.22,-600.9 236.22,-1015.75 cw(c212.6,-1015.75) 212.6,-1039.37 -212.6,-1039.37 cw(c-212.6,-1015.75) -236.22,-1015.75 -236.22,-600.9 -236.23,-600.89 ccw(c-261.34,-600.89) -250.73,-578.12

## Other copper
Top Layer:
  region net GND: 534.99,760.38 ccw(c534.99,705.26) 479.88,705.26 ccw(c534.99,705.26) 534.99,650.14 ccw(c534.99,705.26) 590.11,705.26 ccw(c534.99,705.26) 534.99,760.38
  region net GND: -534.99,760.38 ccw(c-534.99,705.26) -590.11,705.26 ccw(c-534.99,705.26) -534.99,650.14 ccw(c-534.99,705.26) -479.88,705.26 ccw(c-534.99,705.26) -534.99,760.38
  region net GND: 817.57,1147.79 cw(c817.57,994.25) 971.11,994.25 cw(c817.57,994.25) 817.57,840.71 cw(c817.57,994.25) 664.02,994.25 cw(c817.57,994.25)
  region net GND: -817.56,1147.79 cw(c-817.56,994.25) -664.02,994.25 cw(c-817.56,994.25) -817.57,840.71 cw(c-817.57,994.25) -971.11,994.25 cw(c-817.57,994.25)
Bottom Layer:
  region net +3V3: 50,400 70,400 cw(c70,390) 80,390 80,290 cw(c70,290) 70,280 50,280
  region net GND: 534.99,760.38 cw(c534.99,705.26) 590.11,705.26 cw(c534.99,705.26) 534.99,650.14 cw(c534.99,705.26) 479.88,705.26 cw(c534.99,705.26) 534.99,760.38
  region net GND: -534.99,760.38 cw(c-534.99,705.26) -479.88,705.26 cw(c-534.99,705.26) -534.99,650.14 cw(c-534.99,705.26) -590.11,705.26 cw(c-534.99,705.26) -534.99,760.38
  region net GND: -817.57,1147.79 ccw(c-817.57,994.25) -971.11,994.25 ccw(c-817.57,994.25) -817.57,840.71 ccw(c-817.57,994.25) -664.02,994.25 ccw(c-817.57,994.25)
  region net GND: 817.56,1147.79 ccw(c817.56,994.25) 664.02,994.25 ccw(c817.56,994.25) 817.56,840.71 ccw(c817.56,994.25) 971.11,994.25 ccw(c817.56,994.25)
  region net GND: -295,-20 -255,-20 -255,-60 -295,-60

## Silkscreen, mask and mechanical layers (free items; w line width, h text height)
Top Overlay:
  region: -221.22,-1024.37 221.22,-1024.37 221.22,-1000 196.85,-1000 -196.85,-1000 -221.22,-1000
  lines w12: -535.81,637.82 ccw(c-469,571.01) -493.45,479.74 -474.85,474.76 ccw(c-437.49,614.17) -365.32,489.18 -303.15,525.07 cw(c0,0) 303.15,525.07 365.32,489.18 ccw(c437.49,614.17) 474.85,474.76 493.45,479.74 ccw(c469,571.01) 535.81,637.82 502.4,671.23 ; -535,638.45 -501.59,671.85 ccw(c-534.99,705.26) -580.63,717.49 cw(c-671.9,741.94) -719.14,823.77 ccw(c-817.57,994.25) -978.82,1107.16 ccw(c-636.97,867.79) -744.98,464.69 -572.88,418.58 cw(c-593.26,342.52) -525.07,303.15 ccw(c0,0) 525.07,303.15 cw(c593.26,342.52) 572.88,418.58 744.98,464.69 ccw(c636.97,867.79) 978.82,1107.16 ccw(c817.57,994.25) 719.14,823.77 cw(c671.9,741.94) 580.63,717.49 ccw(c534.99,705.26) 501.59,671.85 ; -221.22,-1015.75 ccw(c-212.6,-1015.75) -212.6,-1024.37 212.6,-1024.37 ccw(c212.6,-1015.75) 221.22,-1015.75 221.22,-600.9 cw(c0,0) -221.22,-600.9 -221.22,-1015.75
  text "KitSprout" at -398.39,213.83 h120
  text "DeerDongle" at -398.39,115.49 h106
Bottom Overlay:
  region: -220.47,-948.82 -196.85,-948.82 -196.85,-615.9 196.85,-615.9 196.85,-948.82 220.47,-948.82 220.47,-592.28 196.85,-592.28 -196.85,-592.28 -220.47,-592.28
  lines w10: -412.38,-178.84 ccw(c0,-150) 412.38,-178.84 ; -412.38,-121.16 cw(c0,-150) -292.31,142.31 ; -393.16,-170.6 ccw(c0,-150) 393.16,-170.6 ; -393.16,-129.4 cw(c0,-150) -263.44,142.58 ; 263.44,142.58 cw(c0,-150) 393.16,-129.4 ; 292.31,142.31 cw(c0,-150) 412.38,-121.16
  lines w12: -221.22,-1015.75 ccw(c-212.6,-1015.75) -212.6,-1024.37 212.6,-1024.37 ccw(c212.6,-1015.75) 221.22,-1015.75 221.22,-600.9 ccw(c212.6,-600.9) 212.6,-592.28 -212.6,-592.28 ccw(c-212.6,-600.9) -221.22,-600.9 -221.22,-1015.75
  text "1V8" at -400,160 h60 r270
  text "GND" at -300,160 h60 r270
  text "RXD" at -200,160 h60 r270
  text "TXD" at -100,160 h60 r270
  text "3V3" at 0,160 h60 r270
  text "VIN" at 100,160 h60 r270
  text "GND" at 200,160 h60 r270
  text "BAT" at 300,160 h60 r270
  text "LIR2032 Battery" at 193.43,-84.35 h120
  text "KitSprout.com" at 221.22,-1024.37 h70
Mechanical 1:
  lines w2: -485.7,654.52 -519.11,621.12 ccw(c-469,571.01) -487.34,502.56 -468.73,497.57 ccw(c-437.49,614.17) -377.13,509.63 -314.96,545.53 cw(c0,0) -163.04,608.46 -113.76,621.66 ccw(c-125.98,667.3) -78.74,667.3 -78.74,669.29 cw(c0,669.29) 78.74,669.29 78.74,667.3 ccw(c125.98,667.3) 113.76,621.66 163.04,608.46 cw(c0,0) 314.96,545.53 377.13,509.63 ccw(c437.49,614.17) 468.73,497.57 487.34,502.56 ccw(c469,571.01) 519.11,621.12 485.7,654.52 ; -484.88,655.15 ccw(c-534.99,705.26) -603.45,723.6 cw(c-671.9,741.94) -707.33,803.32 ccw(c-817.57,994.25) -998.17,1120.71 ccw(c-636.97,867.79) -751.09,441.87 -579,395.76 cw(c-593.26,342.52) -545.53,314.96 ccw(c0,0) -266.22,-570.9 -250.73,-578.12 cw(c-261.34,-600.89) -236.23,-600.89 ; -236.22,-600.9 -236.22,-1015.75 ccw(c-212.6,-1015.75) -212.6,-1039.37 212.6,-1039.37 ccw(c212.6,-1015.75) 236.22,-1015.75 236.22,-600.9 ; 236.23,-600.89 cw(c261.34,-600.89) 250.73,-578.12 266.22,-570.9 ccw(c0,0) 545.53,314.96 cw(c593.26,342.52) 579,395.76 751.09,441.87 ccw(c636.97,867.79) 998.17,1120.71 ccw(c817.57,994.25) 707.33,803.31 cw(c671.9,741.94) 603.44,723.6 ccw(c534.99,705.26) 484.88,655.15
Mechanical 2:
  lines w2: -413.39,-185.43 -474.41,-185.43 -474.41,-248.43 474.41,-248.43 474.41,-185.43 413.39,-185.43 ; -413.39,-114.57 -474.41,-114.57 -474.41,-51.57 474.41,-51.57 474.41,-114.57 413.39,-114.57 ; -413.39,-51.57 -413.39,-248.43 413.39,-248.43 413.39,-51.57 ; -98.43,-150 98.43,-150 ; 0,-248.43 0,-51.57

## Text inside footprints (layer, text, board x,y; h text height)
B1: Mechanical 4 "+" at 225,105 h30 r90; Mechanical 4 "-" at 315,105 h30 r90
D2: Mechanical 4 "+" at 191.99,-115.97 h20 r270